# Altium PCB AT_START_F425_V1.0.pcbdoc (part 1 of 2)
Units mil, origin at the board's own origin, x right, y up, seen from the top; angles counter-clockwise.
Board outline 5780.4 x 4040.43 mil, 2 copper layers (Top Layer, Bottom Layer); 128 components, 128 nets, 477 pads, 724 vias.
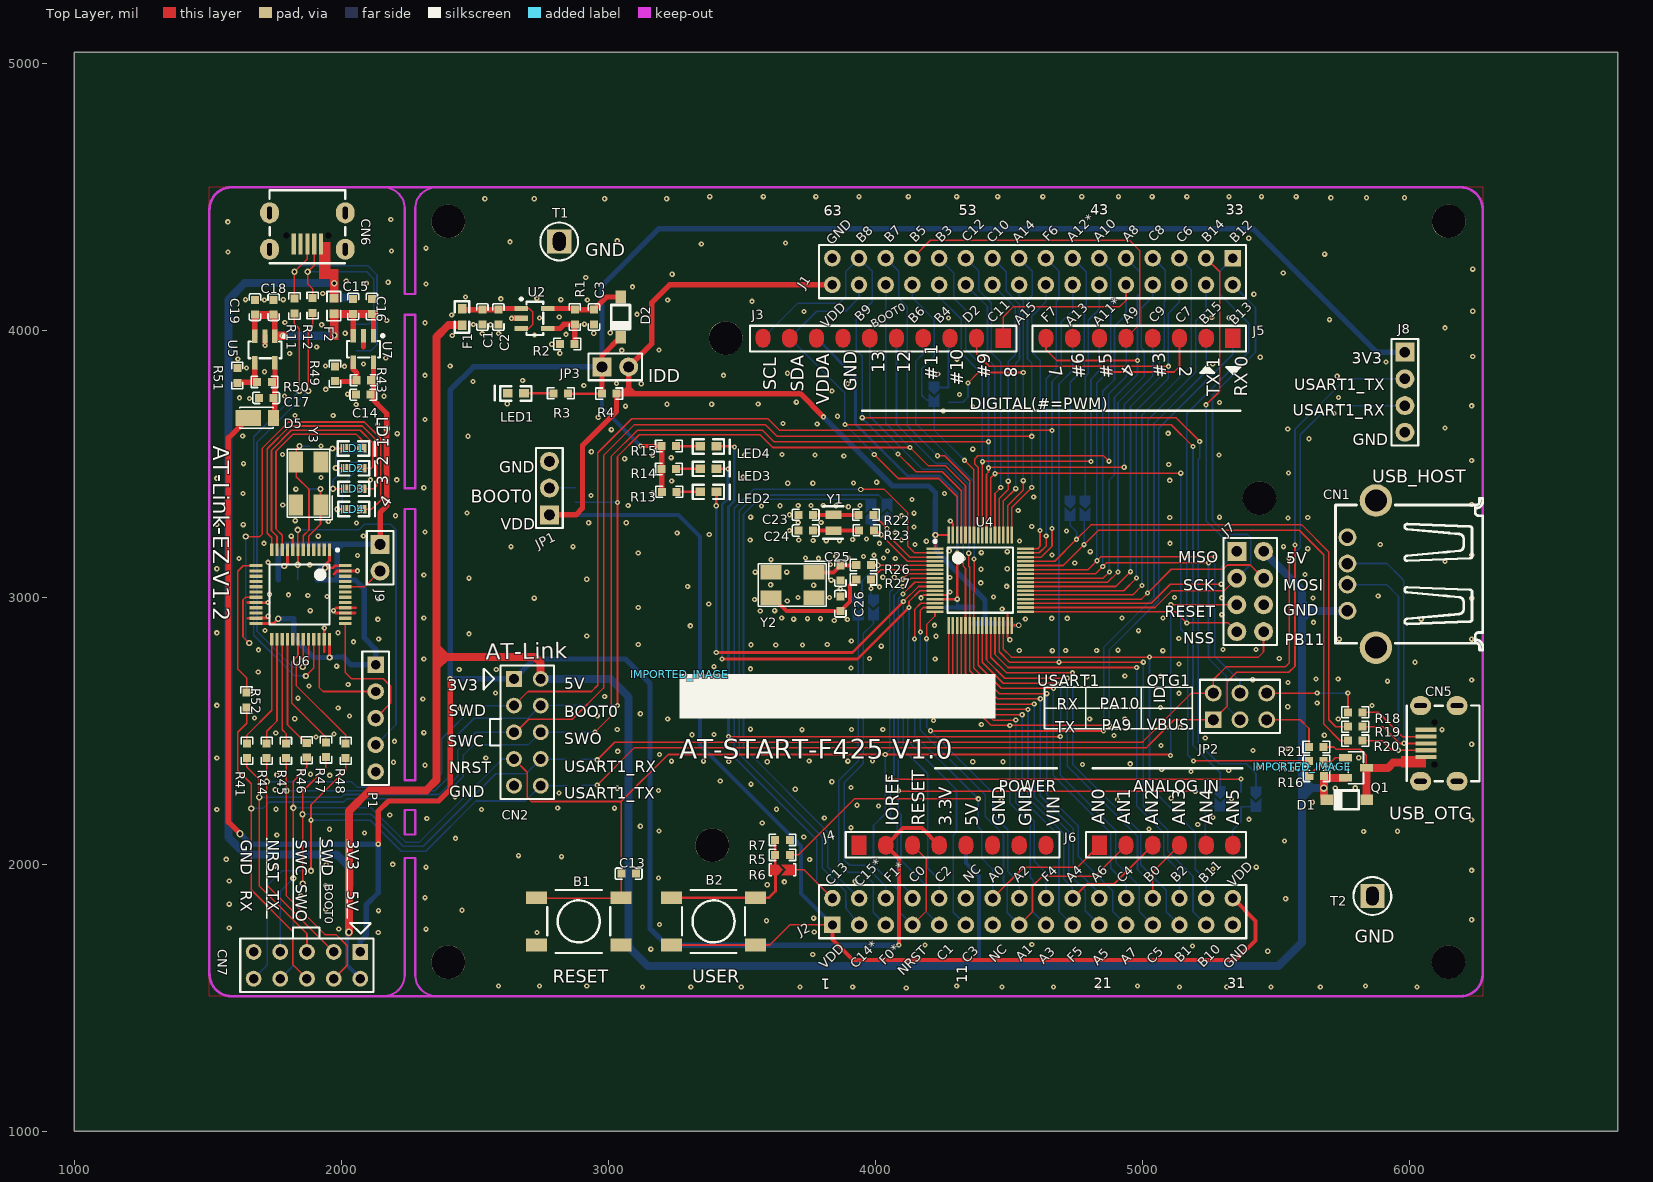
[diagram p0: Top Layer view]
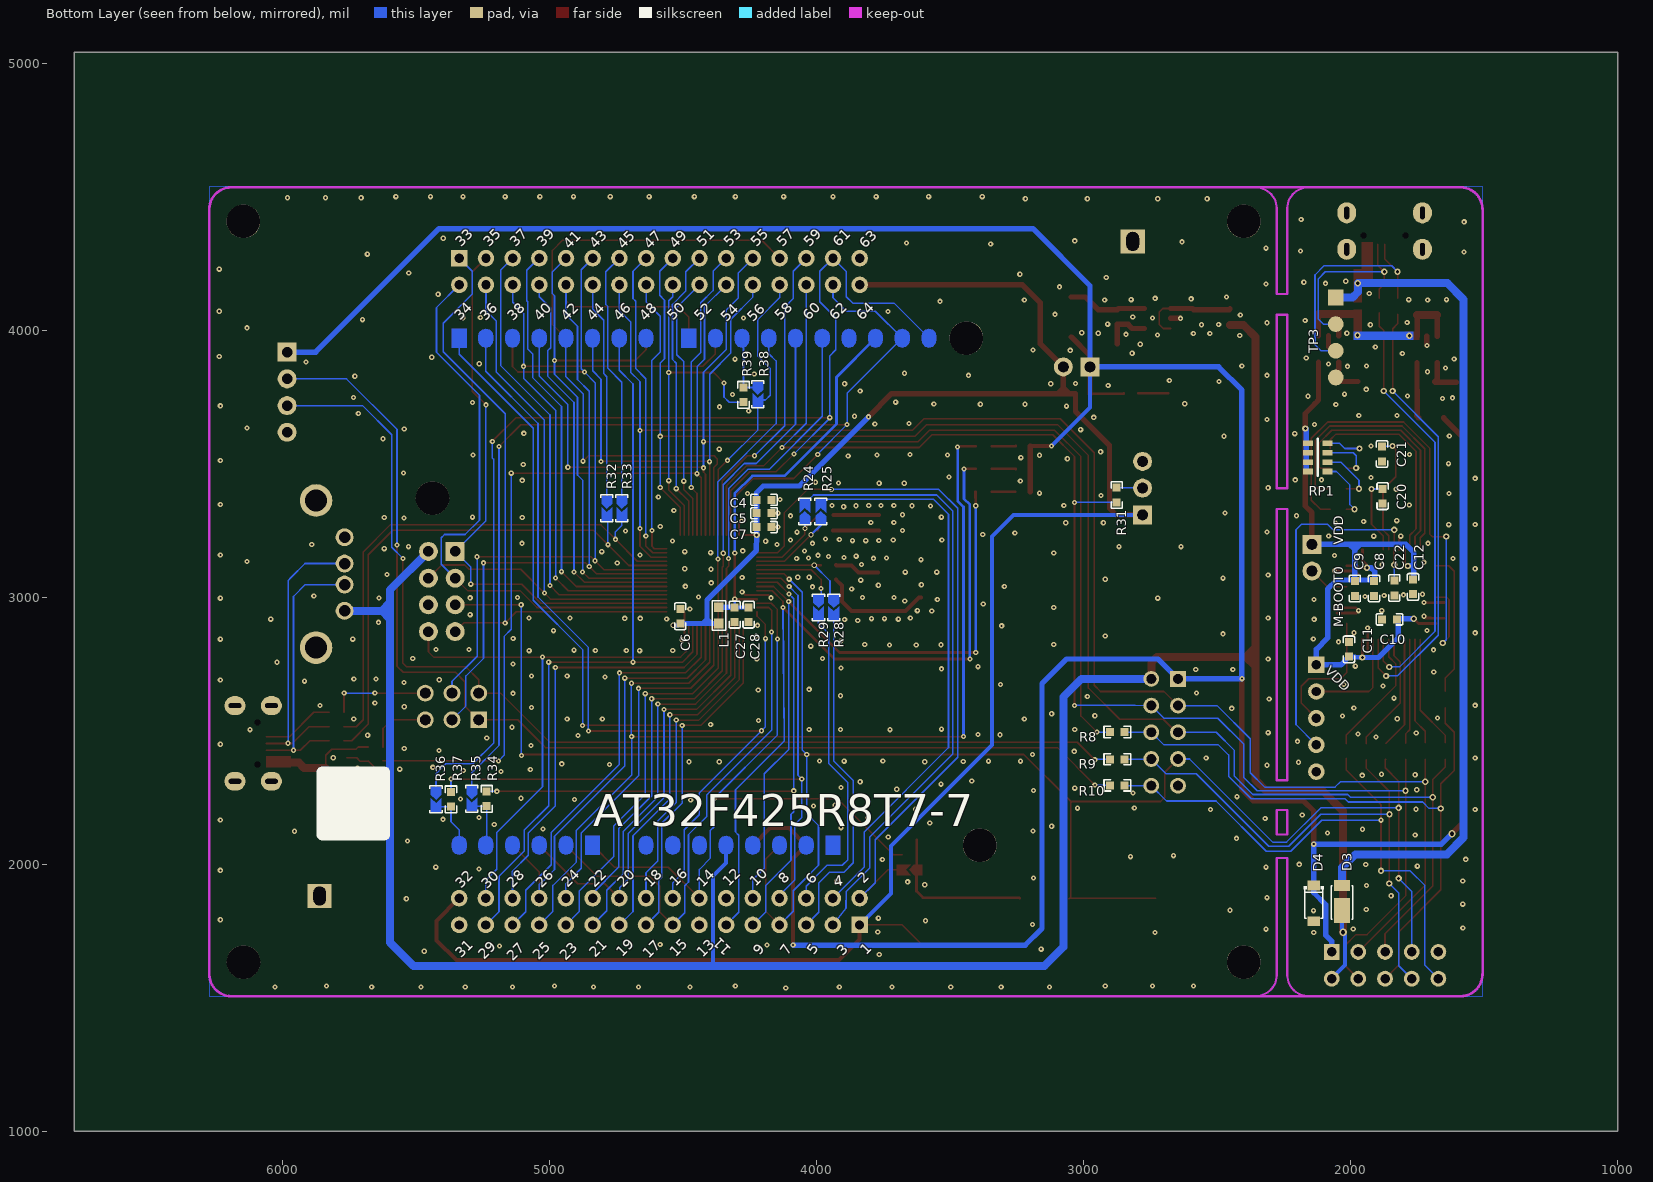
[diagram p1: Bottom Layer view, seen from below]

## Layer stack, top to bottom
Top Layer: signal copper (thickness not stored)
Dielectric: dielectric 12.6, FR-4, Dk 4.8
Bottom Layer: signal copper (thickness not stored)

## Board outline
6780.4,1000 1000,1000 1000,5040.43 6780.4,5040.43

## Components (designator, comment, footprint, x,y, rotation, side; value= is the part's Value field where it differs from the comment)
B1 "BUTTON_SMT,6.0x6.0x4.5mm" BUTTON_SMT_6*6*5 2889.09,1785.57 r0 top
B2 "BUTTON_SMT,6.0x6.0x4.5mm" BUTTON_SMT_6*6*5 3394.09,1785.57 r180 top
C1 "10uF" 0603_C-M#1 2528.09,4049.37 r90 top
C2 "0.1uF" 0603_C-M#1 2588.09,4049.37 r90 top
C3 "10uF" 0603_C-M#1 2946.09,4049.37 r90 top
C4 "4.7uF" 0603_C-M#2 4197.09,3364.57 r180 bottom
C5 "0.1uF" 0603_C-M#2 4197.09,3314.57 r180 bottom
C6 "0.1uF" 0603_C-M#2 4511.09,2928.57 r90 bottom
C7 "0.1uF" 0603_C-M#2 4197.09,3262.57 r180 bottom
C8 "4.7uF" 0603_C-M#2 1912.09,3032.57 r270 bottom
C9 "0.1uF" 0603_C-M#2 1984.09,3032.57 r270 bottom
C10 "0.1uF" 0603_C-M#2 1854.09,2916.57 r0 bottom
C11 "0.1uF" 0603_C-M#2 2006.09,2804.57 r90 bottom
C12 "0.1uF" 0603_C-M#2 1766.09,3038.57 r270 bottom
C13 "0.1uF" 0603_C-M#1 3076.09,1964.57 r0 top
C14 "10uF" 0603_C-M#1 2082.09,3758.57 r0 top
C15 "10uF" 0603_C-M#1 2044.09,4088.57 r270 top
C16 "0.1uF" 0603_C-M#1 2114.09,4088.57 r270 top
C17 "10uF" 0603_C-M#1 1718.09,3746.57 r0 top
C18 "10uF" 0603_C-M#1 1746.09,4086.57 r270 top
C19 "0.1uF" 0603_C-M#1 1676.09,4086.57 r270 top
C20 "22pF" 0603_C-M#2 1880.09,3378.57 r270 bottom
C21 "22pF" 0603_C-M#2 1882.09,3536.57 r90 bottom
C22 "0.1uF" 0603_C-M#2 1836.09,3034.57 r270 bottom
C23 "10pF" 0603_C-M#1 3739.09,3308.57 r180 top
C24 "10pF" 0603_C-M#1 3739.09,3249.57 r180 top
C25 "22pF" 0603_C-M#1 3869.09,3090.57 r270 top
C26 "22pF" 0603_C-M#1 3869.09,2975.57 r90 top
C27 "1uF" 0603_C-M#2 4307.09,2934.57 r90 bottom
C28 "0.1uF" 0603_C-M#2 4255.09,2934.57 r90 bottom
CN1 "USB type A" USB-A-TH__USB-AF-90 5822.09,3086.57 r90 top
CN2 "NC(Header 2x5)" HDR2X5#1 2646.44,2693.84 r270 top
CN5 "USB micro-B" USB_MIC_DIP 6062.07,2451.97 r0 top
CN6 "USB_micro B" USB_MIC_DIP 1872.64,4322.58 r90 top
CN7 "CON1" HDR2X5#2 2070.89,1670.96 r180 top
D1 "DFLS130L-7" SOD-123 5766.09,2240.57 r0 top
D2 "DFLS130L-7" SOD-123 3046.09,4049.36 r90 top
D3 "DFLS130L-7" POWERDI-123_L2.8-W1.8-LS3.7-RD#1 2032.14,1872.57 r270 bottom
D4 "SMF3.3A" SOD-123_L2.8-W1.8-LS3.7-RD 2138.09,1852.57 r90 bottom
D5 "DFLS130L-7" POWERDI-123_L2.8-W1.8-LS3.7-RD#2 1698.09,3671.57 r0 top
F1 "SMD0603B050TF" R0603#1 2452.09,4018.86 r90 top
F2 "SMD0603B050TF" R0603#2 1972.09,4090.57 r270 top
IMPORTED_IMAGE "IMPORTED_IMAGE" IMPORTED_IMAGE 5598.85,2365.11 r0 top
IMPORTED_IMAGE "IMPORTED_IMAGE" IMPORTED_IMAGE 3267.54,2711.68 r0 top
J1 "Header 2x16" HDR-M-2.54_2X16 4588.96,4219.86 r180 top
J2 "Header 2x16" HDR-M-2.54_2X16 4589.38,1822.14 r0 top
J3 "CON10" "FEMALE HEADER 1X10" 4479.38,3970.56 r180 top
J4 "CON8" "FEMALE HEADER 1X8" 3939.38,2070.56 r0 top
J5 "CON8" "FEMALE HEADER 1X8" 5339.38,3970.56 r180 top
J6 "CON6" "FEMALE HEADER 1X6" 4839.38,2070.57 r0 top
J7 "Header 4X2" HDR2X4 5354.39,3171.16 r270 top
J8 "Header 1x4" HDR1X4 5983.99,3917.66 r270 top
J9 "1X2P,Male,DIP_2.54" HDR1X2 2144.89,3197.97 r270 top
JP1 "Header 1x3" "HEADER 1X3" 2779.09,3308.57 r90 top
JP2 "Header 3X2" HDR2X3 5266.09,2540.57 r0 top
JP3 "NC(Header 1x2)" "HEADER 1X2" 2976.09,3862.57 r0 top
L1 "0.2A,600R@100Mhz" 0603_L 4366.09,2931.57 r270 bottom
LD1 "RED" LED0603 2014.9,3556.81 r0 top
LD2 "GREEN" LED0603 2015.86,3482.72 r0 top
LD3 "BLUE" LED0603 2015.9,3405.81 r0 top
LD4 "YELLOW" LED0603 2015.86,3329.81 r0 top
LED1 "RED" LED0603 2684.09,3763.57 r180 top
LED2 "RED" LED0603 3344.09,3394.57 r0 top
LED3 "YELLOW" LED0603 3344.09,3480.57 r0 top
LED4 "GREEN" LED0603 3344.09,3564.57 r0 top
P1 "HDR-M-2.54_1x5" HDR-M-2.54_1X5 2128.09,2546.57 r270 top
Q1 "SI2301" SOT-23-3_L2.9-W1.3-P1.90-LS2.4-BR 5800.09,2360.57 r180 top
R1 "51k" 0603_R-M#1 2874.09,4049.37 r270 top
R2 "15k" 0603_R-M#1 2846.09,3948.57 r180 top
R3 "1k" 0603_R-M#1 2822.09,3763.57 r0 top
R4 "0R" 0603_R-M#1 3003.09,3762.57 r0 top
R5 "0R" 0603_R-M#1 3652.09,2034.57 r0 top
R6 "NC" SB-PAD 3652.09,1978.57 r0 top
R7 "100R" 0603_R-M#1 3652.09,2090.57 r180 top
R8 "470R" 0603_R-M#2 2873.79,2494.76 r180 bottom
R9 "470R" 0603_R-M#2 2873.79,2392.76 r180 bottom
R10 "470R" 0603_R-M#2 2873.79,2294.76 r180 bottom
R11 "0R" 0603_R-M#1 1824.09,4090.57 r90 top
R12 "0R" 0603_R-M#1 1892.09,4092.57 r90 top
R13 "1K" 0603_R-M#1 3228.09,3394.57 r0 top
R14 "1K" 0603_R-M#1 3226.7,3480.21 r0 top
R15 "1K" 0603_R-M#1 3226.7,3566.21 r0 top
R16 "10K" 0603_R-M#1 5653.09,2330.57 r0 top
R17 "470R" 0603_R-M#1 5652.09,2386.57 r0 top
R18 "1K" 0603_R-M#1 5798.09,2568.57 r0 top
R19 "22R" 0603_R-M#1 5798.09,2514.57 r180 top
R20 "22R" 0603_R-M#1 5798.09,2462.57 r0 top
R21 "10K" 0603_R-M#1 5652.09,2438.57 r0 top
R22 "0R" 0603_R-M#1 3965.09,3308.57 r0 top
R23 "0R" 0603_R-M#1 3967.09,3250.57 r0 top
R24 "NC" SB-PAD 4044.09,3320.57 r270 bottom
R25 "NC" SB-PAD 3984.09,3320.57 r270 bottom
R26 "0R" 0603_R-M#1 3956.09,3120.57 r0 top
R27 "0R" 0603_R-M#1 3956.09,3066.57 r0 top
R28 "NC" SB-PAD 3936.09,2961.57 r90 bottom
R29 "NC" SB-PAD 3993.09,2961.57 r90 bottom
R31 "10K" 0603_R-M#2 2876.09,3382.57 r270 bottom
R32 "NC" SB-PAD 4786.09,3332.57 r90 bottom
R33 "NC" SB-PAD 4730.09,3332.57 r90 bottom
R34 "0R" 0603_R-M#2 5236.09,2244.57 r90 bottom
R35 "NC" SB-PAD 5292.09,2244.57 r90 bottom
R36 "NC" SB-PAD 5426.09,2242.57 r90 bottom
R37 "0R" 0603_R-M#2 5370.09,2242.57 r90 bottom
R38 "NC" SB-PAD 4220.09,3759.93 r90 bottom
R39 "0R" 0603_R-M#2 4274.09,3757.93 r270 bottom
R41 "33R" 0603_R-M#1 1646.09,2424.57 r270 top
R43 "47K" 0603_R-M#1 2084.09,3812.57 r180 top
R44 "33R" 0603_R-M#1 1720.09,2424.57 r270 top
R45 "33R" 0603_R-M#1 1792.09,2424.57 r270 top
R46 "33R" 0603_R-M#1 1870.09,2426.57 r270 top
R47 "33R" 0603_R-M#1 1942.09,2428.57 r270 top
R48 "33R" 0603_R-M#1 2016.09,2424.57 r270 top
R49 "15K" 0603_R-M#1 1976.09,3836.57 r270 top
R50 "51K" 0603_R-M#1 1712.09,3806.57 r180 top
R51 "15K" 0603_R-M#1 1610.09,3830.57 r270 top
R52 "33R" 0603_R-M#1 1644.09,2614.57 r270 top
RP1 "1K" 0603*4,8P4R 2160.09,3576.57 r90 bottom
T1 "Testpoint" TESTHOOK 2816.09,4332.56 r270 top
T2 "Testpoint" TESTHOOK 5862.09,1880.57 r90 top
TP3 "1X4P_2.54F" "HDR1X4 - TOP" 2055.44,4123.02 r270 bottom
U2 "RT9080N-08GJ5" SOT-23-5 2738.09,3981.54 r0 top
U4 "AT32F425R8T7-7" IC_LQFP64_7X7 4393.09,3063.57 r0 top
U5 "RT9080N-08GJ5" SOT-23-5 1650.66,3912.91 r270 top
U6 "AT32F403CGT6" "LQFP48 - 2" 1955.6,3177.02 r270 top
U7 "RT9080N-08GJ5" SOT-23-5 2019.86,3914.91 r270 top
Y1 "32.768KHz" "XTAL_SOP - FC-12M" 3843.09,3308.57 r270 top
Y2 "8MHz" OSC-SMD_4P-L5.0-W3.2-BL 3689.09,3045.57 r180 top
Y3 "8MHz" OSC-SMD_4P-L5.0-W3.2-BL 1876.49,3426.07 r90 top

## Footprints (in the part's own frame and the unit in brackets; to place one, negate y for a bottom-side part, rotate by r counter-clockwise, add the part's x,y. Pads: shape width x height; smd on the part's side, far side on the other; paste and mask are expansions set on the pad)
0603*4,8P4R [mm]
  rect 0.55x0.95 smd paste+0 mask+0.102: 1(0,0) 4(-2.7,0) 5(-2.7,-1.85) 8(0,-1.85)
  rect 0.5x0.95 smd paste+0 mask+0.102: 2(-0.9,0) 3(-1.8,0) 6(-1.8,-1.85) 7(-0.9,-1.85)
  silkscreen extent -3.1,-0.94 0.43,-0.94
0603_C-M#1 [mil]
  rect 30x30 smd paste+0 mask+4: 1(27.5,0) 2(-27.5,0)
  silkscreen extent -50,-21 50,21
0603_C-M#2 [mil]
  rect 30x30 smd paste+0 mask+4: 1(-27.5,0) 2(27.5,0)
  silkscreen extent -50,-21 50,21
0603_L [mm]
  rect 0.93x0.9 smd paste+0 mask+0.102: 1(0.77,0) 2(-0.77,0)
  silkscreen extent -1.4,-0.64 1.4,0.64
0603_R-M#1 [mil]
  rect 30x30 smd paste+0 mask+4: 1(27.5,0) 2(-27.5,0)
  silkscreen extent -50,-21 50,21
0603_R-M#2 [mil]
  rect 30x30 smd paste+0 mask+4: 1(-27.5,0) 2(27.5,0)
  silkscreen extent -50,-21 50,21
BUTTON_SMT_6*6*5 [mm]
  rect 2x1.2 smd paste+0 mask+0.102: 1(-4,2.25) 2(4,2.25) 3(-4,-2.25) 4(4,-2.25)
  silkscreen extent -3,-3 3,3
"FEMALE HEADER 1X6" [mil]
  Top Layer region: 527.56,-7.87 523.87,-21.65 513.78,-31.74 500,-35.43 486.22,-31.74 476.13,-21.65 472.44,-7.87 472.44,7.87 476.13,21.65 486.22,31.74 500,35.43 513.78,31.74 523.87,21.65 527.56,7.87
  Top Layer region: 427.56,-7.87 423.87,-21.65 413.78,-31.74 400,-35.43 386.22,-31.74 376.13,-21.65 372.44,-7.87 372.44,7.87 376.13,21.65 386.22,31.74 400,35.43 413.78,31.74 423.87,21.65 427.56,7.87
  Top Layer region: 327.56,-7.87 323.87,-21.65 313.78,-31.74 300,-35.43 286.22,-31.74 276.13,-21.65 272.44,-7.87 272.44,7.87 276.13,21.65 286.22,31.74 300,35.43 313.78,31.74 323.87,21.65 327.56,7.87
  Top Layer region: 227.56,-7.87 223.87,-21.65 213.78,-31.74 200,-35.43 186.22,-31.74 176.13,-21.65 172.44,-7.87 172.44,7.87 176.13,21.65 186.22,31.74 200,35.43 213.78,31.74 223.87,21.65 227.56,7.87
  Top Layer region: 127.56,-7.87 123.87,-21.65 113.78,-31.74 100,-35.43 86.22,-31.74 76.13,-21.65 72.44,-7.87 72.44,7.87 76.13,21.65 86.22,31.74 100,35.43 113.78,31.74 123.87,21.65 127.56,7.87
  Top Layer region: -27.56,35.43 27.56,35.43 27.56,-35.43 -27.56,-35.43
  Bottom Layer region: 527.56,-7.87 523.87,-21.65 513.78,-31.74 500,-35.43 486.22,-31.74 476.13,-21.65 472.44,-7.87 472.44,7.87 476.13,21.65 486.22,31.74 500,35.43 513.78,31.74 523.87,21.65 527.56,7.87
  Bottom Layer region: 427.56,-7.87 423.87,-21.65 413.78,-31.74 400,-35.43 386.22,-31.74 376.13,-21.65 372.44,-7.87 372.44,7.87 376.13,21.65 386.22,31.74 400,35.43 413.78,31.74 423.87,21.65 427.56,7.87
  Bottom Layer region: 327.56,-7.87 323.87,-21.65 313.78,-31.74 300,-35.43 286.22,-31.74 276.13,-21.65 272.44,-7.87 272.44,7.87 276.13,21.65 286.22,31.74 300,35.43 313.78,31.74 323.87,21.65 327.56,7.87
  Bottom Layer region: 227.56,-7.87 223.87,-21.65 213.78,-31.74 200,-35.43 186.22,-31.74 176.13,-21.65 172.44,-7.87 172.44,7.87 176.13,21.65 186.22,31.74 200,35.43 213.78,31.74 223.87,21.65 227.56,7.87
  Bottom Layer region: 127.56,-7.87 123.87,-21.65 113.78,-31.74 100,-35.43 86.22,-31.74 76.13,-21.65 72.44,-7.87 72.44,7.87 76.13,21.65 86.22,31.74 100,35.43 113.78,31.74 123.87,21.65 127.56,7.87
  Bottom Layer region: -27.56,35.43 27.56,35.43 27.56,-35.43 -27.56,-35.43
  Multi-Layer region: 527.56,-7.87 523.87,-21.65 513.78,-31.74 500,-35.43 486.22,-31.74 476.13,-21.65 472.44,-7.87 472.44,7.87 476.13,21.65 486.22,31.74 500,35.43 513.78,31.74 523.87,21.65 527.56,7.87
  Multi-Layer region: 427.56,-7.87 423.87,-21.65 413.78,-31.74 400,-35.43 386.22,-31.74 376.13,-21.65 372.44,-7.87 372.44,7.87 376.13,21.65 386.22,31.74 400,35.43 413.78,31.74 423.87,21.65 427.56,7.87
  Multi-Layer region: 327.56,-7.87 323.87,-21.65 313.78,-31.74 300,-35.43 286.22,-31.74 276.13,-21.65 272.44,-7.87 272.44,7.87 276.13,21.65 286.22,31.74 300,35.43 313.78,31.74 323.87,21.65 327.56,7.87
  Multi-Layer region: 227.56,-7.87 223.87,-21.65 213.78,-31.74 200,-35.43 186.22,-31.74 176.13,-21.65 172.44,-7.87 172.44,7.87 176.13,21.65 186.22,31.74 200,35.43 213.78,31.74 223.87,21.65 227.56,7.87
  Multi-Layer region: 127.56,-7.87 123.87,-21.65 113.78,-31.74 100,-35.43 86.22,-31.74 76.13,-21.65 72.44,-7.87 72.44,7.87 76.13,21.65 86.22,31.74 100,35.43 113.78,31.74 123.87,21.65 127.56,7.87
  Multi-Layer region: -27.56,35.43 27.56,35.43 27.56,-35.43 -27.56,-35.43
  silkscreen extent -50,-46 550,50
"FEMALE HEADER 1X8" [mil]
  Top Layer region: 727.56,-7.87 723.87,-21.65 713.78,-31.74 700,-35.43 686.22,-31.74 676.13,-21.65 672.44,-7.87 672.44,7.87 676.13,21.65 686.22,31.74 700,35.43 713.78,31.74 723.87,21.65 727.56,7.87
  Top Layer region: 627.56,-7.87 623.87,-21.65 613.78,-31.74 600,-35.43 586.22,-31.74 576.13,-21.65 572.44,-7.87 572.44,7.87 576.13,21.65 586.22,31.74 600,35.43 613.78,31.74 623.87,21.65 627.56,7.87
  Top Layer region: 527.56,-7.87 523.87,-21.65 513.78,-31.74 500,-35.43 486.22,-31.74 476.13,-21.65 472.44,-7.87 472.44,7.87 476.13,21.65 486.22,31.74 500,35.43 513.78,31.74 523.87,21.65 527.56,7.87
  Top Layer region: 427.56,-7.87 423.87,-21.65 413.78,-31.74 400,-35.43 386.22,-31.74 376.13,-21.65 372.44,-7.87 372.44,7.87 376.13,21.65 386.22,31.74 400,35.43 413.78,31.74 423.87,21.65 427.56,7.87
  Top Layer region: 327.56,-7.87 323.87,-21.65 313.78,-31.74 300,-35.43 286.22,-31.74 276.13,-21.65 272.44,-7.87 272.44,7.87 276.13,21.65 286.22,31.74 300,35.43 313.78,31.74 323.87,21.65 327.56,7.87
  Top Layer region: 227.56,-7.87 223.87,-21.65 213.78,-31.74 200,-35.43 186.22,-31.74 176.13,-21.65 172.44,-7.87 172.44,7.87 176.13,21.65 186.22,31.74 200,35.43 213.78,31.74 223.87,21.65 227.56,7.87
  Top Layer region: 127.56,-7.87 123.87,-21.65 113.78,-31.74 100,-35.43 86.22,-31.74 76.13,-21.65 72.44,-7.87 72.44,7.87 76.13,21.65 86.22,31.74 100,35.43 113.78,31.74 123.87,21.65 127.56,7.87
  Top Layer region: -27.56,35.43 27.56,35.43 27.56,-35.43 -27.56,-35.43
  Bottom Layer region: 727.56,-7.87 723.87,-21.65 713.78,-31.74 700,-35.43 686.22,-31.74 676.13,-21.65 672.44,-7.87 672.44,7.87 676.13,21.65 686.22,31.74 700,35.43 713.78,31.74 723.87,21.65 727.56,7.87
  Bottom Layer region: 627.56,-7.87 623.87,-21.65 613.78,-31.74 600,-35.43 586.22,-31.74 576.13,-21.65 572.44,-7.87 572.44,7.87 576.13,21.65 586.22,31.74 600,35.43 613.78,31.74 623.87,21.65 627.56,7.87
  Bottom Layer region: 527.56,-7.87 523.87,-21.65 513.78,-31.74 500,-35.43 486.22,-31.74 476.13,-21.65 472.44,-7.87 472.44,7.87 476.13,21.65 486.22,31.74 500,35.43 513.78,31.74 523.87,21.65 527.56,7.87
  Bottom Layer region: 427.56,-7.87 423.87,-21.65 413.78,-31.74 400,-35.43 386.22,-31.74 376.13,-21.65 372.44,-7.87 372.44,7.87 376.13,21.65 386.22,31.74 400,35.43 413.78,31.74 423.87,21.65 427.56,7.87
  Bottom Layer region: 327.56,-7.87 323.87,-21.65 313.78,-31.74 300,-35.43 286.22,-31.74 276.13,-21.65 272.44,-7.87 272.44,7.87 276.13,21.65 286.22,31.74 300,35.43 313.78,31.74 323.87,21.65 327.56,7.87
  Bottom Layer region: 227.56,-7.87 223.87,-21.65 213.78,-31.74 200,-35.43 186.22,-31.74 176.13,-21.65 172.44,-7.87 172.44,7.87 176.13,21.65 186.22,31.74 200,35.43 213.78,31.74 223.87,21.65 227.56,7.87
  Bottom Layer region: 127.56,-7.87 123.87,-21.65 113.78,-31.74 100,-35.43 86.22,-31.74 76.13,-21.65 72.44,-7.87 72.44,7.87 76.13,21.65 86.22,31.74 100,35.43 113.78,31.74 123.87,21.65 127.56,7.87
  Bottom Layer region: -27.56,35.43 27.56,35.43 27.56,-35.43 -27.56,-35.43
  Multi-Layer region: 727.56,-7.87 723.87,-21.65 713.78,-31.74 700,-35.43 686.22,-31.74 676.13,-21.65 672.44,-7.87 672.44,7.87 676.13,21.65 686.22,31.74 700,35.43 713.78,31.74 723.87,21.65 727.56,7.87
  Multi-Layer region: 627.56,-7.87 623.87,-21.65 613.78,-31.74 600,-35.43 586.22,-31.74 576.13,-21.65 572.44,-7.87 572.44,7.87 576.13,21.65 586.22,31.74 600,35.43 613.78,31.74 623.87,21.65 627.56,7.87
  Multi-Layer region: 527.56,-7.87 523.87,-21.65 513.78,-31.74 500,-35.43 486.22,-31.74 476.13,-21.65 472.44,-7.87 472.44,7.87 476.13,21.65 486.22,31.74 500,35.43 513.78,31.74 523.87,21.65 527.56,7.87
  Multi-Layer region: 427.56,-7.87 423.87,-21.65 413.78,-31.74 400,-35.43 386.22,-31.74 376.13,-21.65 372.44,-7.87 372.44,7.87 376.13,21.65 386.22,31.74 400,35.43 413.78,31.74 423.87,21.65 427.56,7.87
  Multi-Layer region: 327.56,-7.87 323.87,-21.65 313.78,-31.74 300,-35.43 286.22,-31.74 276.13,-21.65 272.44,-7.87 272.44,7.87 276.13,21.65 286.22,31.74 300,35.43 313.78,31.74 323.87,21.65 327.56,7.87
  Multi-Layer region: 227.56,-7.87 223.87,-21.65 213.78,-31.74 200,-35.43 186.22,-31.74 176.13,-21.65 172.44,-7.87 172.44,7.87 176.13,21.65 186.22,31.74 200,35.43 213.78,31.74 223.87,21.65 227.56,7.87
  Multi-Layer region: 127.56,-7.87 123.87,-21.65 113.78,-31.74 100,-35.43 86.22,-31.74 76.13,-21.65 72.44,-7.87 72.44,7.87 76.13,21.65 86.22,31.74 100,35.43 113.78,31.74 123.87,21.65 127.56,7.87
  Multi-Layer region: -27.56,35.43 27.56,35.43 27.56,-35.43 -27.56,-35.43
  silkscreen extent -50,-46 750,50
"FEMALE HEADER 1X10" [mil]
  Top Layer region: 927.56,-7.87 923.87,-21.65 913.78,-31.74 900,-35.43 886.22,-31.74 876.13,-21.65 872.44,-7.87 872.44,7.87 876.13,21.65 886.22,31.74 900,35.43 913.78,31.74 923.87,21.65 927.56,7.87
  Top Layer region: 827.56,-7.87 823.87,-21.65 813.78,-31.74 800,-35.43 786.22,-31.74 776.13,-21.65 772.44,-7.87 772.44,7.87 776.13,21.65 786.22,31.74 800,35.43 813.78,31.74 823.87,21.65 827.56,7.87
  Top Layer region: 727.56,-7.87 723.87,-21.65 713.78,-31.74 700,-35.43 686.22,-31.74 676.13,-21.65 672.44,-7.87 672.44,7.87 676.13,21.65 686.22,31.74 700,35.43 713.78,31.74 723.87,21.65 727.56,7.87
  Top Layer region: 627.56,-7.87 623.87,-21.65 613.78,-31.74 600,-35.43 586.22,-31.74 576.13,-21.65 572.44,-7.87 572.44,7.87 576.13,21.65 586.22,31.74 600,35.43 613.78,31.74 623.87,21.65 627.56,7.87
  Top Layer region: 527.56,-7.87 523.87,-21.65 513.78,-31.74 500,-35.43 486.22,-31.74 476.13,-21.65 472.44,-7.87 472.44,7.87 476.13,21.65 486.22,31.74 500,35.43 513.78,31.74 523.87,21.65 527.56,7.87
  Top Layer region: 427.56,-7.87 423.87,-21.65 413.78,-31.74 400,-35.43 386.22,-31.74 376.13,-21.65 372.44,-7.87 372.44,7.87 376.13,21.65 386.22,31.74 400,35.43 413.78,31.74 423.87,21.65 427.56,7.87
  Top Layer region: 327.56,-7.87 323.87,-21.65 313.78,-31.74 300,-35.43 286.22,-31.74 276.13,-21.65 272.44,-7.87 272.44,7.87 276.13,21.65 286.22,31.74 300,35.43 313.78,31.74 323.87,21.65 327.56,7.87
  Top Layer region: 227.56,-7.87 223.87,-21.65 213.78,-31.74 200,-35.43 186.22,-31.74 176.13,-21.65 172.44,-7.87 172.44,7.87 176.13,21.65 186.22,31.74 200,35.43 213.78,31.74 223.87,21.65 227.56,7.87
  Top Layer region: 127.56,-7.87 123.87,-21.65 113.78,-31.74 100,-35.43 86.22,-31.74 76.13,-21.65 72.44,-7.87 72.44,7.87 76.13,21.65 86.22,31.74 100,35.43 113.78,31.74 123.87,21.65 127.56,7.87
  Top Layer region: -27.56,35.43 27.56,35.43 27.56,-35.43 -27.56,-35.43
  Bottom Layer region: 927.56,-7.87 923.87,-21.65 913.78,-31.74 900,-35.43 886.22,-31.74 876.13,-21.65 872.44,-7.87 872.44,7.87 876.13,21.65 886.22,31.74 900,35.43 913.78,31.74 923.87,21.65 927.56,7.87
  Bottom Layer region: 827.56,-7.87 823.87,-21.65 813.78,-31.74 800,-35.43 786.22,-31.74 776.13,-21.65 772.44,-7.87 772.44,7.87 776.13,21.65 786.22,31.74 800,35.43 813.78,31.74 823.87,21.65 827.56,7.87
  Bottom Layer region: 727.56,-7.87 723.87,-21.65 713.78,-31.74 700,-35.43 686.22,-31.74 676.13,-21.65 672.44,-7.87 672.44,7.87 676.13,21.65 686.22,31.74 700,35.43 713.78,31.74 723.87,21.65 727.56,7.87
  Bottom Layer region: 627.56,-7.87 623.87,-21.65 613.78,-31.74 600,-35.43 586.22,-31.74 576.13,-21.65 572.44,-7.87 572.44,7.87 576.13,21.65 586.22,31.74 600,35.43 613.78,31.74 623.87,21.65 627.56,7.87
  Bottom Layer region: 527.56,-7.87 523.87,-21.65 513.78,-31.74 500,-35.43 486.22,-31.74 476.13,-21.65 472.44,-7.87 472.44,7.87 476.13,21.65 486.22,31.74 500,35.43 513.78,31.74 523.87,21.65 527.56,7.87
  Bottom Layer region: 427.56,-7.87 423.87,-21.65 413.78,-31.74 400,-35.43 386.22,-31.74 376.13,-21.65 372.44,-7.87 372.44,7.87 376.13,21.65 386.22,31.74 400,35.43 413.78,31.74 423.87,21.65 427.56,7.87
  Bottom Layer region: 327.56,-7.87 323.87,-21.65 313.78,-31.74 300,-35.43 286.22,-31.74 276.13,-21.65 272.44,-7.87 272.44,7.87 276.13,21.65 286.22,31.74 300,35.43 313.78,31.74 323.87,21.65 327.56,7.87
  Bottom Layer region: 227.56,-7.87 223.87,-21.65 213.78,-31.74 200,-35.43 186.22,-31.74 176.13,-21.65 172.44,-7.87 172.44,7.87 176.13,21.65 186.22,31.74 200,35.43 213.78,31.74 223.87,21.65 227.56,7.87
  Bottom Layer region: 127.56,-7.87 123.87,-21.65 113.78,-31.74 100,-35.43 86.22,-31.74 76.13,-21.65 72.44,-7.87 72.44,7.87 76.13,21.65 86.22,31.74 100,35.43 113.78,31.74 123.87,21.65 127.56,7.87
  Bottom Layer region: -27.56,35.43 27.56,35.43 27.56,-35.43 -27.56,-35.43
  Multi-Layer region: 927.56,-7.87 923.87,-21.65 913.78,-31.74 900,-35.43 886.22,-31.74 876.13,-21.65 872.44,-7.87 872.44,7.87 876.13,21.65 886.22,31.74 900,35.43 913.78,31.74 923.87,21.65 927.56,7.87
  Multi-Layer region: 827.56,-7.87 823.87,-21.65 813.78,-31.74 800,-35.43 786.22,-31.74 776.13,-21.65 772.44,-7.87 772.44,7.87 776.13,21.65 786.22,31.74 800,35.43 813.78,31.74 823.87,21.65 827.56,7.87
  Multi-Layer region: 727.56,-7.87 723.87,-21.65 713.78,-31.74 700,-35.43 686.22,-31.74 676.13,-21.65 672.44,-7.87 672.44,7.87 676.13,21.65 686.22,31.74 700,35.43 713.78,31.74 723.87,21.65 727.56,7.87
  Multi-Layer region: 627.56,-7.87 623.87,-21.65 613.78,-31.74 600,-35.43 586.22,-31.74 576.13,-21.65 572.44,-7.87 572.44,7.87 576.13,21.65 586.22,31.74 600,35.43 613.78,31.74 623.87,21.65 627.56,7.87
  Multi-Layer region: 527.56,-7.87 523.87,-21.65 513.78,-31.74 500,-35.43 486.22,-31.74 476.13,-21.65 472.44,-7.87 472.44,7.87 476.13,21.65 486.22,31.74 500,35.43 513.78,31.74 523.87,21.65 527.56,7.87
  Multi-Layer region: 427.56,-7.87 423.87,-21.65 413.78,-31.74 400,-35.43 386.22,-31.74 376.13,-21.65 372.44,-7.87 372.44,7.87 376.13,21.65 386.22,31.74 400,35.43 413.78,31.74 423.87,21.65 427.56,7.87
  Multi-Layer region: 327.56,-7.87 323.87,-21.65 313.78,-31.74 300,-35.43 286.22,-31.74 276.13,-21.65 272.44,-7.87 272.44,7.87 276.13,21.65 286.22,31.74 300,35.43 313.78,31.74 323.87,21.65 327.56,7.87
  Multi-Layer region: 227.56,-7.87 223.87,-21.65 213.78,-31.74 200,-35.43 186.22,-31.74 176.13,-21.65 172.44,-7.87 172.44,7.87 176.13,21.65 186.22,31.74 200,35.43 213.78,31.74 223.87,21.65 227.56,7.87
  Multi-Layer region: 127.56,-7.87 123.87,-21.65 113.78,-31.74 100,-35.43 86.22,-31.74 76.13,-21.65 72.44,-7.87 72.44,7.87 76.13,21.65 86.22,31.74 100,35.43 113.78,31.74 123.87,21.65 127.56,7.87
  Multi-Layer region: -27.56,35.43 27.56,35.43 27.56,-35.43 -27.56,-35.43
  silkscreen extent -50,-46 949,50
HDR1X2 [mm]
  rect 1.8x1.8 hole 1 slot 1.005 at 0 deg paste+0 mask+0.051: 1(0,0)
  round 1.8 hole 1 slot 1.005 at 0 deg paste+0 mask+0.051: 2(2.54,0)
  silkscreen extent -1.27,-1.27 3.81,1.27
HDR1X4 [mm]
  rect 1.8x1.8 hole 1 paste+0 mask+0.102: 1(0,0)
  round 1.8 hole 1 paste+0 mask+0.102: 2(2.54,0) 3(5.08,0) 4(7.62,0)
  silkscreen extent -1.27,-1.27 8.89,1.27
"HDR1X4 - TOP" [mm]
  rect 1.5x1.5 smd paste+0 mask+0.102: 1(0,0)
  round 1.5 smd paste+0 mask+0.102: 2(2.54,0) 3(5.08,0) 4(7.62,0)
HDR2X3 [mm]
  rect 1.6x1.6 hole 1 slot 1.005 at 0 deg paste+0 mask+0.051: 1(0,0)
  round 1.6 hole 1 slot 1.005 at 0 deg paste+0 mask+0.051: 2(0,2.54) 3(2.54,0) 4(2.54,2.54) 5(5.08,0) 6(5.08,2.54)
  silkscreen extent -1.27,-1.27 6.35,3.81
HDR2X4 [mm]
  rect 1.8x1.8 hole 1 paste+0 mask+0.102: 1(0,0)
  round 1.8 hole 1 paste+0 mask+0.102: 2(0,2.54) 3(2.54,0) 4(2.54,2.54) 5(5.08,0) 6(5.08,2.54) 7(7.62,0) 8(7.62,2.54)
  silkscreen extent -1.27,-1.27 8.89,3.81
HDR2X5#1 [mm]
  rect 1.5x1.5 hole 0.9 slot 0.905 at 0 deg paste+0 mask+0.051: 1(0,0)
  round 1.5 hole 0.9 slot 0.905 at 0 deg paste+0 mask+0.051: 2(0,2.54) 3(2.54,0) 4(2.54,2.54) 5(5.08,0) 6(5.08,2.54) 7(7.62,0) 8(7.62,2.54) 9(10.16,0) 10(10.16,2.54)
  silkscreen extent -1.27,-1.27 11.43,3.81
HDR2X5#2 [mm]
  rect 1.5x1.5 hole 0.9 paste+0 mask+0.102: 1(0,0)
  round 1.5 hole 0.9 paste+0 mask+0.102: 2(0,2.54) 3(2.54,0) 4(2.54,2.54) 5(5.08,0) 6(5.08,2.54) 7(7.62,0) 8(7.62,2.54) 9(10.16,0) 10(10.16,2.54)
  silkscreen extent -1.27,-1.27 11.43,3.81
HDR-M-2.54_1X5 [mil]
  rect 62x62 hole 35 paste+0 mask+2: 1(-200,0)
  round 62 hole 35 paste+0 mask+2: 2(-100,0) 3(0,0) 4(100,0) 5(200,0)
  silkscreen extent -250,-50 250,50
HDR-M-2.54_2X16 [mil]
  rect 62x62 hole 35 paste+0 mask+2: 1(-750,-50)
  round 62 hole 35 paste+0 mask+2: 2(-750,50) 3(-650,-50) 4(-650,50) 5(-550,-50) 6(-550,50) 7(-450,-50) 8(-450,50) 9(-350,-50) 10(-350,50) 11(-250,-50) 12(-250,50) 13(-150,-50) 14(-150,50) 15(-50,-50) 16(-50,50) 17(50,-50) 18(50,50) 19(150,-50) 20(150,50) 21(250,-50) 22(250,50) 23(350,-50) 24(350,50) 25(450,-50) 26(450,50) 27(550,-50) 28(550,50) 29(650,-50) 30(650,50) 31(750,-50) 32(750,50)
  silkscreen extent -800,-100 800,100
"HEADER 1X2" [mm]
  rect 1.8x1.8 hole 1 slot 1.005 at 0 deg paste+0 mask+0.051: 1(0,0)
  round 1.8 hole 1 slot 1.005 at 0 deg paste+0 mask+0.051: 2(2.54,0)
  silkscreen extent -1.27,-1.27 3.81,1.27
"HEADER 1X3" [mm]
  rect 1.8x1.8 hole 1 slot 1.005 at 0 deg paste+0 mask+0.051: 1(0,0)
  round 1.8 hole 1 slot 1.005 at 0 deg paste+0 mask+0.051: 2(2.54,0) 3(5.08,0)
  silkscreen extent -1.27,-1.27 6.35,1.27
IC_LQFP64_7X7 [mm]
  rect 1.6x0.25 smd paste+0 mask+0.102: 1(-4.3,3) 2(-4.3,2.6) 3(-4.3,2.2) 4(-4.3,1.8) 5(-4.3,1.4) 6(-4.3,1) 7(-4.3,0.6) 8(-4.3,0.2) 9(-4.3,-0.2) 10(-4.3,-0.6) 11(-4.3,-1) 12(-4.3,-1.4) 13(-4.3,-1.8) 14(-4.3,-2.2) 15(-4.3,-2.6) 16(-4.3,-3) 33(4.3,-3) 34(4.3,-2.6) 35(4.3,-2.2) 36(4.3,-1.8) 37(4.3,-1.4) 38(4.3,-1) 39(4.3,-0.6) 40(4.3,-0.2) 41(4.3,0.2) 42(4.3,0.6) 43(4.3,1) 44(4.3,1.4) 45(4.3,1.8) 46(4.3,2.2) 47(4.3,2.6) 48(4.3,3)
  rect 0.25x1.6 smd paste+0 mask+0.102: 17(-3,-4.3) 18(-2.6,-4.3) 19(-2.2,-4.3) 20(-1.8,-4.3) 21(-1.4,-4.3) 22(-1,-4.3) 23(-0.6,-4.3) 24(-0.2,-4.3) 25(0.2,-4.3) 26(0.6,-4.3) 27(1,-4.3) 28(1.4,-4.3) 29(1.8,-4.3) 30(2.2,-4.3) 31(2.6,-4.3) 32(3,-4.3) 49(3,4.3) 50(2.6,4.3) 51(2.2,4.3) 52(1.8,4.3) 53(1.4,4.3) 54(1,4.3) 55(0.6,4.3) 56(0.2,4.3) 57(-0.2,4.3) 58(-0.6,4.3) 59(-1,4.3) 60(-1.4,4.3) 61(-1.8,4.3) 62(-2.2,4.3) 63(-2.6,4.3) 64(-3,4.3)
  silkscreen extent -4.42,-3.1 3.1,3.82
IMPORTED_IMAGE [mil]
LED0603 [mil]
  rect 36x32 smd paste+0 mask+4: 1(-0.04,0.2) 2(60.96,0.2)
  silkscreen extent -28,-28 110,27
"LQFP48 - 2" [mm]
  rect 1.2x0.3 smd paste+0 mask+0.102: 1(0,0) 2(0,-0.5) 3(0,-1) 4(0,-1.5) 5(0,-2) 6(0,-2.5) 7(0,-3) 8(0,-3.5) 9(0,-4) 10(0,-4.5) 11(0,-5) 12(0,-5.5) 25(8.5,-5.5) 26(8.5,-5) 27(8.5,-4.5) 28(8.5,-4) 29(8.5,-3.5) 30(8.5,-3) 31(8.5,-2.5) 32(8.5,-2) 33(8.5,-1.5) 34(8.5,-1) 35(8.5,-0.5) 36(8.5,0)
  rect 0.3x1.2 smd paste+0 mask+0.102: 13(1.5,-7) 14(2,-7) 15(2.5,-7) 16(3,-7) 17(3.5,-7) 18(4,-7) 19(4.5,-7) 20(5,-7) 21(5.5,-7) 22(6,-7) 23(6.5,-7) 24(7,-7) 37(7,1.5) 38(6.5,1.5) 39(6,1.5) 40(5.5,1.5) 41(5,1.5) 42(4.5,1.5) 43(4,1.5) 44(3.5,1.5) 45(3,1.5) 46(2.5,1.5) 47(2,1.5) 48(1.5,1.5)
  silkscreen extent -0.12,-5.71 7.11,0.89
OSC-SMD_4P-L5.0-W3.2-BL [mm]
  rect 2x1.4 smd paste+0 mask+0.051: 1(-2.05,-1.2) 2(2.05,-1.2) 3(2.05,1.2) 4(-2.05,1.2)
  silkscreen extent -3.46,-2.26 3.24,2.03
POWERDI-123_L2.8-W1.8-LS3.7-RD#1 [mm]
  rect 2.4x1.5 smd paste+0 mask+0.051: 1(1.187,0)
  rect 1.05x1.5 smd paste+0 mask+0.051: 2(-1.187,0)
  silkscreen extent -1.2,-1 2,1
POWERDI-123_L2.8-W1.8-LS3.7-RD#2 [mm]
  rect 2.4x1.5 smd paste+0 mask+0.051: 1(-1.187,0)
  rect 1.05x1.5 smd paste+0 mask+0.051: 2(1.187,0)
  silkscreen extent -2,-1 1.2,1
R0603#1 [mil]
  rect 36x32 smd paste+0 mask+4: 1(-0.04,0.2) 2(60.96,0.2)
  silkscreen extent -28,-27 89,27
R0603#2 [mil]
  rect 31.75x34.02 smd paste-3937.01 mask+2: 1(-29.66,0) 2(29.66,0)
  silkscreen extent -55,-26 55,26
SB-PAD [mil]
  Top Layer region: -47.24,-19.68 -47.24,19.68 -16.45,19.68 1,0 -17.05,-19.68
  Top Layer region: -4.69,19.68 15,0 -4.69,-19.69 47.24,-19.68 47.24,19.68
  silkscreen extent -50,-23 50,23
SOD-123 [mm]
  rect 1.2x1 smd paste+0 mask+0.102: 1(1.905,0) 2(-1.905,0)
  silkscreen extent -1.14,-0.89 1.14,0.89
SOD-123_L2.8-W1.8-LS3.7-RD [mm]
  rect 0.95x1.15 smd paste+0 mask+0.051: 1(1.693,0) 2(-1.693,0)
  silkscreen extent -1.41,-0.94 1.63,0.94
SOT-23-3_L2.9-W1.3-P1.90-LS2.4-BR [mm]
  rect 1.25x0.7 smd paste+0 mask+0.051: 1(1,-0.95) 2(1,0.95) 3(-1,0)
  silkscreen extent -0.73,-1.53 0.73,1.53
SOT-23-5 [mil]
  rect 50x20 smd paste+0 mask+4: 1(-65,100) 2(-65,63) 3(-65,25) 4(35,25) 5(35,100)
  silkscreen extent -65,1 18,135
TESTHOOK [mm]
  rect 2.3x2.3 hole 1.2 slot 1.8 at 0 deg paste+0 mask+0.102: 1(0,0)
  silkscreen extent -1.8,-1.8 1.8,1.8
USB-A-TH__USB-AF-90 [mm]
  round 1.7 hole 1.1 paste+0 mask+0.051: 1(-3.5,1.355) 2(-1,1.355) 3(1,1.355) 4(3.5,1.355)
  round 3.1 hole 2.1 paste+0 mask+0.051: SH1(7,-1.355) SH2(-7,-1.355)
  silkscreen extent -7.22,-11.51 7.22,2.49
USB_MIC_DIP [mm]
  rect 2x0.4 smd paste+0 mask+0.102: 1(0,-1.3) 2(0,-0.65) 3(0,0) 4(0,0.65) 5(0,1.3)
  oval 2x1.8 hole 0.45 slot 1.2 at 0 deg paste+0 mask+0.051: 6(-0.495,-3.6) 7(2.975,-3.6) 8(2.975,3.6) 9(-0.495,3.6)
  round 0.5 hole 0.55 slot 0.555 at 0 deg unplated paste+0 mask+0.051: MH1(0.825,2) MH2(0.825,-2)
  silkscreen extent -1.82,-3.6 5.13,3.6
"XTAL_SOP - FC-12M" [mm]
  rect 0.8x1.5 smd paste+0 mask+0.102: 1(0,0) 2(1.5,0)
  silkscreen extent -0.81,-0.99 2.29,0.94

## Free pads (board coordinates)
  round 125.98 hole 125.98 unplated paste+0: ""(2400.09,1632.57) ""(2400.09,4407.56) ""(3389.09,2070.57) ""(3439.09,3970.57) ""(5439.09,3370.57) ""(6147.09,1632.57) ""(6147.72,4407.56)

## Via types
v1: diameter 19.69, hole 7.87, Top Layer to Bottom Layer, tented both sides, 682 vias
v2: diameter 23.62, hole 11.81, Top Layer to Bottom Layer, tented both sides, 33 vias
v3: diameter 19.69, hole 12, Top Layer to Bottom Layer, tented both sides, 5 vias
v4: diameter 27.56, hole 15.75, Top Layer to Bottom Layer, tented both sides, 3 vias
v5: diameter 24, hole 12, Top Layer to Bottom Layer, tented both sides, 1 vias

## Nets (pads, with @x,y where several pads share a name; then routed paths per layer and width w, separated by ;. In a path a pad name is that pad's centre, name@x,y a point inside that pad or via, vN(x,y) a via of type N, cw(c..) or ccw(c..) an arc to the next point about the centre after c; other vN are vias at no path point)
3V3: CN2.1 CN7.1 D2.2 D4.1 D5.1 J8.1 JP3.1 R3.1 R4.2 R13.2 R14.2 R15.2 | length 13007.7
  Top Layer w10: R3.1@2849.59,3763.57 2850.59,3762.57 R4.2@2975.59,3762.57
  Top Layer w15: v1(3120.09,3566.57) 3120.44,3566.22 R15.2@3199.2,3566.21 ; v1(4088.09,1696.57) 4088.09,2021.87 4039.39,2070.57 4103.39,2134.57 4175.39,2134.57 4239.39,2070.57
  Top Layer w20: v4(1619.86,2114.01) 1576.53,2157.34 1576.53,3596.76 D5.1@1651.34,3671.57 ; v1(2138.09,2074.57) 2138.09,2198.57 2176.09,2236.57 2364.09,2236.57 2407.09,2279.57 v1(2407.09,2694.57) ; R4.2@2975.59,3762.57 2976.09,3763.07 JP3.1@2976.09,3862.56 2976.09,3904.36 D2.2@3046.09,3974.36 ; R15.2@3199.2,3566.21 3200.6,3564.84 R13.2@3200.59,3394.57
  Bottom Layer w15: JP3.1@2976.09,3862.56 2976.09,3710.57 v1(3120.09,3566.57)
  Bottom Layer w20: v4(1619.86,2114.01) 1659.31,2074.57 v1(2138.09,2074.57) 2138.09,1892.67 2093.43,1848.02 2093.43,1734.02 2070.86,1711.44 CN7.1@2070.89,1670.96 ; v1(4088.09,1696.57) 3218.8,1696.57 3156.09,1759.28 3156.09,2676.57 3064.09,2768.57 2721.16,2768.57 CN2.1@2646.44,2693.84 2645.72,2694.57 v1(2407.09,2694.57) 2407.09,3775.57 2494.09,3862.57 JP3.1@2976.09,3862.56 2976.09,4166.56 3190.09,4380.56 5414.09,4380.56 5876.99,3917.66 J8.1@5983.99,3917.66
5V: CN1.1 CN2.2 CN7.2 D1.2 D3.1 F1.1 J7.2 Q1.2 R16.1 | length 9889.7
  Top Layer w30: v4(2028.09,1744.57) 2028.09,2198.57 2106.09,2276.57 2318.09,2276.57 2356.09,2314.57 2356.09,3974.57 2400.4,4018.88 F1.1@2451.89,4018.88 ; 2356.09,2742.98 2358.81,2742.98 2391.64,2775.81 ; 2356.09,2809.48 2357.97,2809.48 2391.64,2775.81 ; CN2.2@2746.44,2693.84 2746.44,2754.22 2724.84,2775.81 2391.64,2775.81 ; D1.2@5691.09,2240.57 5680.59,2251.07 5680.59,2283.93 R16.1@5680.59,2330.57 5687.99,2323.16 Q1.2@5760.72,2323.16
  Bottom Layer w15: D3.1@2032.14,1825.82 2032.09,1744.57 2020.09,1732.57 2020.09,1621.79 CN7.2@2070.89,1570.96 ; 4339.39,2070.57 4339.39,2003.27 4388.09,1954.57 4387.56,1614.42
  Bottom Layer w30: CN2.2@2746.44,2693.84 3008.81,2693.84 3076.09,2626.57 3076.09,1689.66 3147.4,1618.37 5509.89,1618.37 5598.09,1706.57 5598.09,2252.94 ; J7.2@5454.39,3171.16 5598.09,3027.47 5598.09,2320.84 ; 5598.09,2920.53 5600.52,2920.53 5628.75,2948.76 ; 5598.09,2982.53 5598.09,2979.43 5628.75,2948.76 ; v4(5680.09,2284.57) 5634.48,2284.57 5602.86,2252.94 5598.09,2252.94 ; v4@5680.59,2283.93 5634.36,2284.57 5598.09,2320.84 ; CN1.1@5768.74,2948.77 5628.75,2948.76 ; 5598.09,2252.94 5598.09,2320.84
ATLINK_5V: CN6.1 D3.2 F2.1 TP3.1 | length 3131.5
  Bottom Layer w30: D3.2@2032.14,1919.32 2032.09,1986.57 1982.09,2036.57 1639.32,2036.57 1576.43,2099.45 1576.43,4115.59 1636.86,4176.02 v2(1973.07,4176.02) 1973.07,4142.39 1992.44,4123.02 TP3.1@2055.44,4123.02
ATLK_RX: CN2.10 CN7.10 R10.2 R48.1 | length 2143.2
  Top Layer w6: v2(1886.09,1974.57) v1(1886.09,2164.57) 1886.09,2222.57 2016.09,2352.57 R48.1@2016.09,2397.07
  Bottom Layer w6: CN7.10@1670.89,1570.96 1721.43,1621.59 1721.43,1920.02 1775.98,1974.57 v2(1886.09,1974.57) ; v1(1886.09,2164.57) 2108.09,2164.57 2224.09,2048.57 2316.09,2048.57 2504.09,2236.57 2689.16,2236.57 CN2.10@2746.44,2293.84 ; CN2.10@2746.48,2293.89 2746.78,2294.2 R10.2@2846.04,2294.2
ATLK_TX: CN2.8 CN7.8 R9.2 R47.1 | length 2063.7
  Top Layer w6: v2(1854.86,1927.02) 1854.86,2273.34 1941.86,2360.34 R47.1@1941.86,2390.01
  Bottom Layer w6: CN7.8@1770.89,1570.96 1819.43,1619.58 1819.43,1891.58 v2(1854.86,1927.02) ; v2(1854.09,2186.57) 2112.09,2186.57 2232.09,2066.57 2306.09,2066.57 2578.09,2338.57 2691.16,2338.57 CN2.8@2746.44,2393.84 2747.54,2392.74 R9.2@2842.24,2392.74
B2_3: B2.3 B2.4 R5.2 R7.1 | length 593.1
  Top Layer w10: B2.4@3239.13,1871.73 3241.54,1874.14 3551.57,1874.14 3601.67,1874.14 3626.09,1898.57 3626.09,1975.68 3628.97,1978.57 3624.59,1982.94 R7.1@3624.59,2090.57
BOOT0: CN2.4 CN7.4 J1.28 R31.2 R45.1 U4.60 | length 5744.4
  Top Layer w6: R45.1@1793.86,2392.01 1793.86,1880.8 1938.64,1736.02 1979.43,1736.02 2021.44,1694.01 2021.44,1621.6 CN7.4@1970.89,1570.96 ; v1(3034.09,2594.57) 3034.09,3526.57 3116.09,3608.57 3568.09,3608.57 3616.09,3560.57 v1(4130.09,3560.57) 4199.09,3491.57 4264.09,3491.57 4337.97,3417.68 U4.60@4337.97,3232.86
  Bottom Layer w6: v2(1794.09,2274.57) 2350.09,2274.57 2400.09,2324.57 2400.09,2449.57 2497.09,2546.57 2699.16,2546.57 CN2.4@2746.44,2593.84 2806.04,2594.57 v1(3034.09,2594.57) ; R31.2@2876.09,3355.07 3010.09,3355.07 v1(3034.09,3355.07) ; J1.28@4038.96,4169.86 4038.96,3651.7 v1(4130.09,3560.57)
CN5_4: CN5.4 R18.1 | length 274.2
  Top Layer w6: R18.1@5825.59,2568.57 5884.09,2568.57 5975.1,2477.55 CN5.4@6062.07,2477.55
D2_1: C3.1 D2.1 R1.2 U2.5 | length 294.6
  Top Layer w20: U2.5@2773.09,4081.54 2869.43,4081.53 R1.2@2874.09,4076.87 C3.1@2946.09,4076.87 2993.58,4124.36 D2.1@3046.09,4124.36
F1_2: C1.1 C2.1 F1.2 U2.1 U2.3 | length 370.1
  Top Layer w6: U2.3@2673.09,4006.54 2702.06,4006.53 2716.09,4020.57 2716.09,4069.57 2704.12,4081.53 U2.1@2673.09,4081.54
  Top Layer w20: F1.2@2451.89,4079.88 2454.89,4076.88 C1.1@2528.09,4076.87 C2.1@2588.09,4076.87 2592.75,4081.53 U2.1@2673.09,4081.54
F2_2: C15.1 C16.1 C18.1 C19.1 F2.2 U5.1 U5.3 U7.1 U7.3 | length 539.3
  Top Layer w20: U5.3@1675.66,3977.91 1675.66,4056.86 C19.1@1676.66,4057.86 ; U5.1@1750.66,3977.91 C18.1@1750.66,4057.86 ; U7.3@2044.86,3979.91 C15.1@2044.86,4058.07 ; U7.1@2119.86,3979.91 C16.1@2119.86,4059.91
  Top Layer w30: C19.1@1676.66,4057.86 C18.1@1750.66,4057.86 ; F2.2@1973.07,4059.95 2119.82,4059.95 C16.1@2119.86,4059.91
  other v2: 1779.86,3979.01 1973.86,3981.01
GND: B1.3 B1.4 C1.2 C2.2 C3.2 C4.2 C5.2 C6.2 C7.2 C8.2 C9.2 C10.2 C11.2 C12.2 C13.1 C14.2 C15.2 C16.2 C17.2 C18.2 C19.2 C20.2 C21.1 C22.2 C23.1 C24.1 C25.1 C26.1 C27.1 C28.1 CN1.4 CN1.SH1 CN1.SH2 CN2.9 CN5.5 CN5.6 CN5.7 CN5.8 CN5.9 CN6.5 CN6.6 CN6.7 CN6.8 CN6.9 CN7.9 D4.2 J1.31 J2.31 J7.6 J8.4 JP1.3 LED1.2 P1.5 R2.1 R7.2 R49.2 R51.2 T1.1 T2.1 TP3.4 U2.2 U4.12 U4.31 U4.63 U5.2 U6.8 U6.20 U6.23 U6.35 U6.39 U6.40 U6.47 U7.2 Y2.2 Y2.4 Y3.2 Y3.4 | length 944.3
  Top Layer w8: v1(4171.09,2997.57) 4181.97,3008.45 U4.12@4223.8,3008.45 4267.97,3008.45 v1(4279.09,3019.57) ; v1(4281.09,3285.57) 4290.72,3275.93 U4.63@4290.73,3232.86 ; 4495.44,2942.57 U4.31@4495.45,2894.28 4495.44,2849.21 v1(4504.09,2840.57)
  Top Layer w10: 1649.09,2921.11 U6.23@1680.01,2921.11 1717.63,2921.11 v1(1725.09,2928.57) ; 1649.09,2980.16 U6.20@1680.01,2980.16 v1(1725.09,2979.57) ; v1(1812.09,3228.57) 1817.81,3222.84 U6.8@1817.81,3177.01 ; 1935.92,2796.57 U6.35@1935.92,2842.36 v1@1935.92,2880.57 ; 1972.09,3086.57 1983.8,3098.28 U6.47@2014.66,3098.28 v1@2054.09,3098.28 ; 2051.09,2940.8 U6.39@2014.66,2940.8 1978.86,2940.8 v1(1970.09,2949.57) 1981,2960.47 U6.40@2014.66,2960.47 2053.09,2960.47
  Top Layer w20: U5.2@1713.66,3977.91 1714.09,3977.47 v1(1714.09,3942.57) ; 2082.86,3938.57 U7.2@2082.86,3979.91 ; v1(2637.09,4044.57) U2.2@2673.09,4044.54
  other v1: 4115.9,1535.68 3127.71,1539.62 3308.82,1539.62 3497.79,1539.62 3718.27,1539.62 3915.12,1539.62 4474.17,1539.62 4667.09,1539.62 4836.38,1539.62 5139.53,1539.62 5316.69,1539.62 5482.05,1539.62 5667.09,1539.62 6029.29,1539.62 2588.34,1543.56 2741.89,1543.56 2919.05,1543.56 4304.88,1543.56 4982.05,1543.56 5836.38,1543.56 3765.51,1661.66 5470.24,1673.47 3159.21,1681.36 5188.44,1693.29 4186.44,1697.02 4586.25,1699.02 2138.09,1743.57 2733.09,1743.57 3771.09,1745.57 2316.69,1756.15 1990.09,1756.57 1579.44,1761.02 3191.09,1773.57 3592.28,1787.65 6234.02,1791.59 3769.09,1797.57 2139.09,1825.57 2451.44,1827.02 1941.09,1829.57 1579.86,1850.02 5537.16,1870.33 2312.75,1874.27 1848.09,1881.57 1940.09,1919.57 3595.09,1922.57 3659.09,1933.57 3925.09,1935.57 1579.86,1936.85 3188.09,1947.57 6234.02,1976.62 5265.09,1981.57 2316.69,1988.43 5426.93,1988.43 1749.76,1992.38 1943.09,1998.57 2192.43,1999.02 1568.44,2017.78 3754.09,2017.57 2824.56,2027.81 2663.15,2031.74 5533.23,2086.86 2427.09,2096.57 3732.09,2101.57 1758.09,2108.57 2086.09,2116.57 5829.44,2122.01 5956.44,2123.01 3190.09,2123.57 1955.09,2130.57 5025.09,2131.57 3909.09,2136.57 3119.84,2141.99 5208.09,2148.57 3576.53,2153.8 6234.02,2165.61 5400.09,2167.57 2320.09,2170.57 3809.09,2172.57 5265.09,2174.57 2181.09,2183.57 1533.23,2204.97 2525.09,2204.57 1755.09,2205.57 3630.09,2205.57 3023.09,2209.57 2810.09,2210.57 4012.09,2217.57 3931.09,2220.57 5638.09,2231.57 4472.09,2240.57 4907.09,2241.57 5334.09,2243.57 5108.09,2246.57 2425.09,2252.57 2815.09,2266.57 3188.09,2275.57 1752.09,2278.57 3700.09,2280.57 3033.09,2284.57 5723.09,2284.57 5798.09,2285.57 3909.09,2286.57 3534.09,2299.57 3837.09,2308.57 3419.05,2311.28 1956.09,2332.57 1758.09,2334.57 1884.09,2336.57 5182.83,2346.7 5324.09,2350.57 5072.6,2354.59 5562.09,2355.57 5720.09,2359.57 5438.09,2362.57 2312.75,2370.32 4776.09,2373.57 4955.09,2375.57 2195.3,2381.72 3595.09,2383.57 4365.09,2383.57 4478.09,2383.57 3451.09,2384.57 3236.09,2385.57 3356.09,2385.57 3897.09,2385.57 3752.09,2386.57 3989.09,2386.57 1533.23,2397.89 2541.1,2397.89 5811.09,2398.57 3191.09,2410.57 3035.09,2422.57 5415.12,2425.45 5545.04,2433.32 5070.09,2444.57 6234.02,2449.07 2199.15,2460.01 5236.09,2472.57 1905.09,2476.57 4894.09,2481.57 5682.09,2482.57 3313.09,2484.57 3396.09,2485.57 1972.09,2487.57 1754.09,2491.57 2308.82,2492.38 3725.09,2503.57 6123.09,2503.57 3033.09,2504.57 3911.09,2504.57 4028.09,2504.57 3532.09,2505.57 5141.09,2512.57 4397.09,2522.57 4218.09,2537.57 3222.2,2543.55 4803.09,2543.57 4934.8,2543.55 5734.09,2543.57 1825.09,2544.57 1674.09,2547.57 2030.19,2555.01 2958.09,2555.57 3119.84,2563.24 2445.09,2583.57 1987.71,2585.01 5068.66,2586.86 5545.09,2589.57 1533.23,2594.74 5861.09,2594.57 5655.09,2603.57 2304.88,2618.36 1837.09,2621.57 2986.09,2627.57 3911.09,2630.57 5138.09,2639.57 2577.09,2640.57 4219.09,2652.57 4028.09,2654.57 1878.09,2667.57 2025.09,2672.57 3311.09,2672.57 5546.09,2680.57 5919.05,2685.3 6234.02,2689.22 5414.1,2690.57 5651.34,2693.16 5734.01,2693.16 4793.07,2701.03 4934.8,2704.97 5068.66,2704.97 1688.44,2720.01 2441.09,2728.57 2580.09,2728.57 3532.09,2731.57 3909.09,2734.57 3396.09,2739.57 1982.09,2741.57 5138.09,2749.57 6021.42,2756.16 2308.82,2767.97 4224.09,2768.57 3978.09,2770.57 5513.09,2770.57 4663.09,2799.57 5077.09,2799.57 4539.09,2800.57 4713.09,2800.57 4829.09,2800.57 4909.09,2801.57 1689.09,2802.57 5302.09,2803.57 5426.09,2803.57 4022.09,2816.57 3627.09,2820.57 3727.09,2820.57 3534.09,2821.57 3111.97,2823.09 3820.09,2822.57 2045.09,2832.57 3910.09,2835.57 2139.44,2843.01 5737.95,2842.78 6234.02,2842.78 5137.09,2845.57 4227.68,2853.72 2919.05,2854.59 2478.11,2862.45 1533.23,2866.39 1987.09,2866.57 4986.09,2874.57 1714.09,2875.57 1936.09,2884.57 3307.09,2892.57 4222.09,2894.57 5641.09,2905.57 3846.09,2912.57 2136.44,2917.01 3895.09,2916.57 3694.09,2917.57 6045.04,2917.57 4562.09,2918.57 3746.09,2919.57 3795.09,2919.57 4661.09,2920.57 4719.09,2920.57 2308.82,2921.51 3649.09,2921.57 4924.09,2921.57 5078.09,2921.57 5298.09,2934.57 3569.09,2948.57 1883.09,2949.57 3623.09,2949.57 4475.09,2955.57 3111.97,2960.89 3376.09,2974.57 3670.09,2985.57 2137.44,2991.01 3548.09,2991.57 2722.2,2996.32 6234.02,2996.32 5640.09,2996.57 5298.09,2997.57 3710.09,2998.57 3828.09,2998.57 5121.09,2998.57 4443.09,3000.57 1946.09,3002.57 5883.62,3004.18 1874.09,3006.57 1802.09,3008.57 1730.6,3010.95 3869.09,3030.57 4016.09,3038.57 3297.09,3039.57 4492.09,3040.57 3769.09,3044.57 3608.09,3046.57 4395.09,3053.57 3835.09,3063.57 2919.05,3067.18 2478.11,3071.11 4279.09,3073.57 4028.09,3074.57 4071.09,3074.57 2308.82,3082.93 5610.09,3084.57 3550.09,3093.57 3668.09,3093.57 2060.09,3098.57 4396.09,3104.57 1533.23,3106.55 4494.09,3106.57 1881.36,3121.01 3832.09,3122.57 4747.09,3127.57 1725.09,3130.57 6134.44,3134.01 3609.09,3140.57 1616.09,3144.57 4075.09,3144.57 3787.09,3145.57 3738.09,3146.57 4031.09,3146.57 3898.09,3148.57 3956.09,3152.57 3852.09,3153.57 2060.33,3156.01 3995.09,3156.57 4662.09,3157.57 6234.02,3157.74 3111.97,3165.61 4397.09,3166.57 4494.09,3170.57 4805.09,3170.57 4046.09,3172.57 4277.09,3173.57 5620.09,3181.57 2635.59,3189.22 2867.87,3189.22 5529.29,3189.22 5891.5,3197.11 4149.09,3197.57 1710.09,3201.57 4016.09,3201.57 5104.09,3201.57 4191.09,3209.57 4540.09,3210.57 3816.09,3211.57 3866.09,3211.57 3767.09,3212.57 3531.09,3214.57 3713.09,3214.57 4098.09,3214.57 3915.09,3215.57 3967.09,3217.57 1913.09,3228.57 2082.09,3229.57 3378.09,3234.57 3257.64,3240.41 2312.75,3244.34 4074.09,3243.57 4716.09,3247.57 3678.09,3249.57 4145.09,3262.57 4586.09,3264.57 1533.23,3271.91 1632.09,3271.57 2056.09,3277.57 2926.09,3278.57 3067.09,3278.57 3711.09,3279.57 3797.09,3279.57 1951.09,3283.57 1827.09,3286.57 5546.09,3296.57 5103.09,3298.57 5620.09,3298.57 3533.09,3299.57 5289.09,3299.57 2202.44,3305.01 4098.09,3304.57 3678.09,3308.57 2470.23,3315.22 4145.09,3314.57 4535.09,3324.57 3899.09,3338.57 3574.09,3341.57 3643.09,3342.57 3853.09,3342.57 3074.09,3343.57 3711.09,3343.57 3759.09,3343.57 3805.09,3343.57 3943.09,3343.57 1780.09,3345.57 6234.02,3346.7 4137.09,3365.57 4593.09,3375.57 2935.09,3380.57 1631.09,3388.57 4259.09,3388.57 3165.09,3389.57 1829.09,3404.57 2308.82,3409.7 3672.09,3426.57 3766.09,3426.57 3918.09,3427.57 4005.09,3430.57 3237.09,3435.57 5103.09,3437.57 2109.09,3439.57 2207.09,3439.57 1533.23,3445.14 1923.09,3448.57 3504.09,3450.57 5548.09,3465.57 5099.09,3496.57 1632.78,3500.01 6234.02,3512.07 3061.09,3518.57 3235.09,3522.57 3882.09,3528.57 3165.09,3531.57 3510.09,3532.57 3774.09,3532.57 5287.09,3532.57 1779.09,3534.57 3650.09,3534.57 2936.09,3544.57 4365.09,3554.57 1923.09,3566.57 5625.09,3593.57 2474.17,3602.61 1630.09,3603.57 2209.09,3612.57 5097.09,3613.57 3011.09,3627.57 5545.09,3629.57 6134.44,3634.01 2135.09,3646.57 3782.09,3648.57 3654.09,3650.57 2312.75,3665.61 2962.09,3673.57 3858.09,3677.57 1826.09,3680.57 1969.09,3680.57 5717.09,3687.57 4254.89,3697.72 4363.94,3712.84 3064.09,3715.57 6234.02,3716.78 2055.09,3721.57 3220.09,3722.57 3387.09,3722.57 3561.09,3723.57 2621.09,3724.57 5289.09,3729.57 3704.09,3730.57 1656.09,3744.57 1618.09,3746.57 5735.09,3747.57 2159.09,3752.57 1787.09,3753.57 4315.09,3759.57 2023.09,3760.57 3837.09,3772.57 1941.09,3778.57 2908.09,3792.57 3123.09,3799.57 3895.09,3799.57 3030.09,3800.57 2493.09,3807.57 2678.9,3811.28 5730.09,3827.57 2312.75,3830.97 3430.86,3830.97 4234.09,3835.57 3671.02,3838.84 1712.09,3844.57 1644.09,3858.57 2011.09,3864.57 1940.09,3865.57 2407.24,3866.39 2083.09,3873.57 5264.09,3874.57 5913.09,3880.57 4306.09,3891.57 1612.09,3892.57 2166.09,3895.57 5442.09,3898.57 6237.95,3901.82 1806.09,3912.57 2818.09,3913.57 3050.09,3924.57 3190.09,3925.57 1907.09,3937.57 2788.09,3947.57 2415.09,3980.57 2722.86,3982.22 2841.09,3984.57 2527.09,3987.57 2589.09,3987.57 2014.09,3988.57 2945.09,3988.57 3007.09,3990.57 6134.44,4009.01 1926.09,4020.57 2558.09,4020.57 2494.09,4021.57 2910.09,4022.57 2312.75,4027.82 1788.09,4028.57 2170.09,4036.57 5701.09,4039.57 2742.09,4045.57 4274.09,4045.57 5325.09,4046.57 5260.09,4047.57 2816.09,4049.57 2413.09,4056.57 3107.09,4059.57 3733.09,4070.57 6237.95,4071.11 3537.92,4108.23 1711.09,4113.56 2921.09,4113.56 3222.09,4113.56 1641.09,4114.56 1782.09,4114.56 2822.09,4114.56 2597.09,4117.56 2732.09,4119.56 2465.09,4124.56 5418.09,4134.56 1930.09,4137.56 3090.09,4162.56 2316.69,4173.48 2094.09,4175.56 2175.09,4179.56 2018.09,4183.56 2915.12,4197.1 3239.09,4209.56 5528.09,4214.56 6237.95,4228.6 5683.44,4285.02 1575.44,4293.02 2187.44,4297.02 2316.69,4307.34 3348.19,4323.09 3663.15,4327.02 2631.65,4330.97 3033.23,4334.9 5399.09,4344.56 1574.44,4406.02 2185.17,4415.02 2537.16,4492.38 2722.2,4492.38 2985.98,4492.38 3218.27,4492.38 5706.46,4496.31 5840.31,4496.31 5982.05,4496.31 3379.68,4500.26 3580.47,4500.26 3777.32,4500.26 3938.74,4500.26 4123.78,4500.26 4304.88,4500.26 4458.42,4500.26 4627.71,4500.26 4773.38,4500.26 4911.18,4500.26 5037.16,4500.26 5167.09,4500.26 5324.57,4500.26 5446.61,4500.26 5576.53,4500.26
J3_3: R39.1 | length 242.3
  Bottom Layer w6: 4220.09,3783.05 4222.47,3785.43 R39.1@4274.09,3785.43 4274.09,3965.26 4279.39,3970.57
J6_5: R34.1 | length 205.7
  Bottom Layer w6: 5239.39,2070.57 5236.09,2073.86 R34.1@5236.09,2217.07 5287.71,2217.07 5292.09,2221.45
J6_6: R37.1 | length 217.6
  Bottom Layer w6: 5339.39,2070.57 5339.39,2127.86 5370.09,2158.57 R37.1@5370.09,2215.07 5426.09,2215.07 5426.09,2219.45
J9_2: J9.2 U6.44 | length 154.6
  Top Layer w6: U6.44@2014.66,3039.22 2086.07,3039.22 J9.2@2144.89,3097.97
JP1_2: JP1.2 R31.1 | length 97.6
  Bottom Layer w6: JP1.2@2779.09,3408.57 2780.6,3410.07 R31.1@2876.09,3410.07
LD1: LD1.2 U6.10 | length 768.4
  Top Layer w6: U6.10@1778.44,3177.01 1778.44,3232.22 1755.09,3255.57 1755.09,3546.57 1819.54,3611.01 2054.86,3611.01 2075.86,3590.01 LD1.2@2075.86,3557.01
LD2: LD2.2 U6.11 | length 945.4
  Top Layer w6: U6.11@1758.75,3177.01 1758.75,3227.91 1738.09,3248.57 1738.09,3550.57 1812.54,3625.01 2070.64,3625.01 2118.09,3577.57 2118.09,3488.24 2112.77,3482.91 LD2.2@2076.82,3482.91
LD3: LD3.2 U6.12 | length 1082.7
  Top Layer w6: U6.12@1739.07,3177.01 1739.07,3222.59 1722.09,3239.57 1722.09,3555.57 1807.54,3641.01 2077.64,3641.01 2132.09,3586.57 2132.09,3417.24 2120.86,3406.01 LD3.2@2076.86,3406.01
LD4: LD4.2 U6.19 | length 1840.9
  Top Layer w6: v2(1641.86,3227.01) 1694.54,3227.01 1704.09,3236.57 1704.09,3558.57 1801.54,3656.01 2085.64,3656.01 2146.86,3594.8 2146.86,3363.34 2113.54,3330.01 LD4.2@2076.82,3330.01 ; v2(1654.44,2828.01) 1631.44,2851.01 1631.44,2991.01 1640.28,2999.84 U6.19@1680.01,2999.84
  Bottom Layer w6: v2(1641.86,3227.01) 1641.86,2840.59 v2(1654.44,2828.01)
LED1_1: LED1.1 R3.2 | length 110.5
  Top Layer w10: LED1.1@2684.13,3763.36 2684.34,3763.57 R3.2@2794.59,3763.57
LED2_1: LED2.1 R13.1 | length 88.5
  Top Layer w10: R13.1@3255.59,3394.57 3255.81,3394.78 LED2.1@3344.05,3394.77
LED3_1: LED3.1 R14.1 | length 90.1
  Top Layer w10: R14.1@3254.2,3480.21 3254.77,3480.78 LED3.1@3344.05,3480.77
LED4_1: LED4.1 R15.1 | length 90.4
  Top Layer w10: R15.1@3254.2,3566.21 3255.65,3564.78 LED4.1@3344.05,3564.77
M-ATLK_RX: R48.2 U6.31 | length 479.5
  Top Layer w6: U6.31@1857.18,2842.36 1857.18,2776.34 1830.09,2749.24 1830.09,2669.45 2015.86,2483.68 R48.2@2015.86,2451.01
M-ATLK_TX: R47.2 U6.30 | length 454
  Top Layer w6: U6.30@1837.49,2842.36 1837.49,2780.64 1814.09,2757.24 1814.09,2603.26 1941.86,2475.49 R47.2@1941.86,2451.01
M-NRST: C22.1 P1.4 U6.7 | length 1410.3
  Top Layer w6: v2(1836.37,3121.01) 1837.49,3122.14 U6.7@1837.49,3177.01 1836.37,3178.14 v2@1836.37,3252.01
  Bottom Layer w6: v2(1836.37,3121.01) 1836.37,3065.34 C22.1@1836.66,3065.05 ; v2(1836.66,3252.01) 2065.44,3252.02 2086.44,3273.01 2183.44,3273.01 2204.44,3252.02 2204.44,2522.92 P1.4@2128.09,2446.57
M-SWCLK: P1.3 U6.37 | length 518.8
  Top Layer w6: U6.37@2014.66,2901.43 2014.66,2717.99 2038.09,2694.57 2157.09,2694.57 2185.09,2666.57 2185.09,2603.57 P1.3@2128.09,2546.57
M-SWDIO: P1.2 U6.34 | length 398.8
  Top Layer w6: U6.34@1916.23,2842.36 1916.23,2661.64 1931.31,2646.57 P1.2@2128.09,2646.57
M-USB_D+: R11.2 U6.33 | length 1687.4
  Top Layer w6: R11.2@1823.86,4058.91 1823.86,4024.01 1842.44,4005.43 v2(1842.44,3772.01) ; v2(1866.86,2705.01) 1896.55,2734.7 U6.33@1896.55,2842.36
  Bottom Layer w6: v2(1842.44,3772.01) 1671.86,3601.43 1671.86,2857.8 1824.64,2705.01 v2(1866.86,2705.01)
M-USB_D-: R12.2 U6.32 | length 1618.8
  Top Layer w6: v2(1855.09,2738.57) 1876.86,2760.34 U6.32@1876.86,2842.36 ; v2(1875.44,3772.01) 1875.44,3998.59 1892.09,4015.24 R12.2@1892.09,4065.07
  Bottom Layer w6: v2(1855.09,2738.57) 1817.09,2738.57 1683.86,2871.79 1683.86,3580.44 v2(1875.44,3772.01)
M_ATLK_BOOT0: R45.2 U6.27 | length 395.7
  Top Layer w6: U6.27@1778.44,2842.36 1778.44,2503.14 1793.86,2487.72 R45.2@1793.86,2453.01
M_ATLK_NRST: R46.2 U6.28 | length 419.2
  Top Layer w6: U6.28@1798.12,2842.36 1798.12,2521.76 R46.2@1867.86,2452.01